# Altium PCB mcu core.PcbDoc
Units mil, origin at the board's own origin, x right, y up, seen from the top; angles counter-clockwise.
Board outline 3900 x 2955 mil, 2 copper layers (Top Layer, Bottom Layer); 26 components, 47 nets, 183 pads, 22 vias.
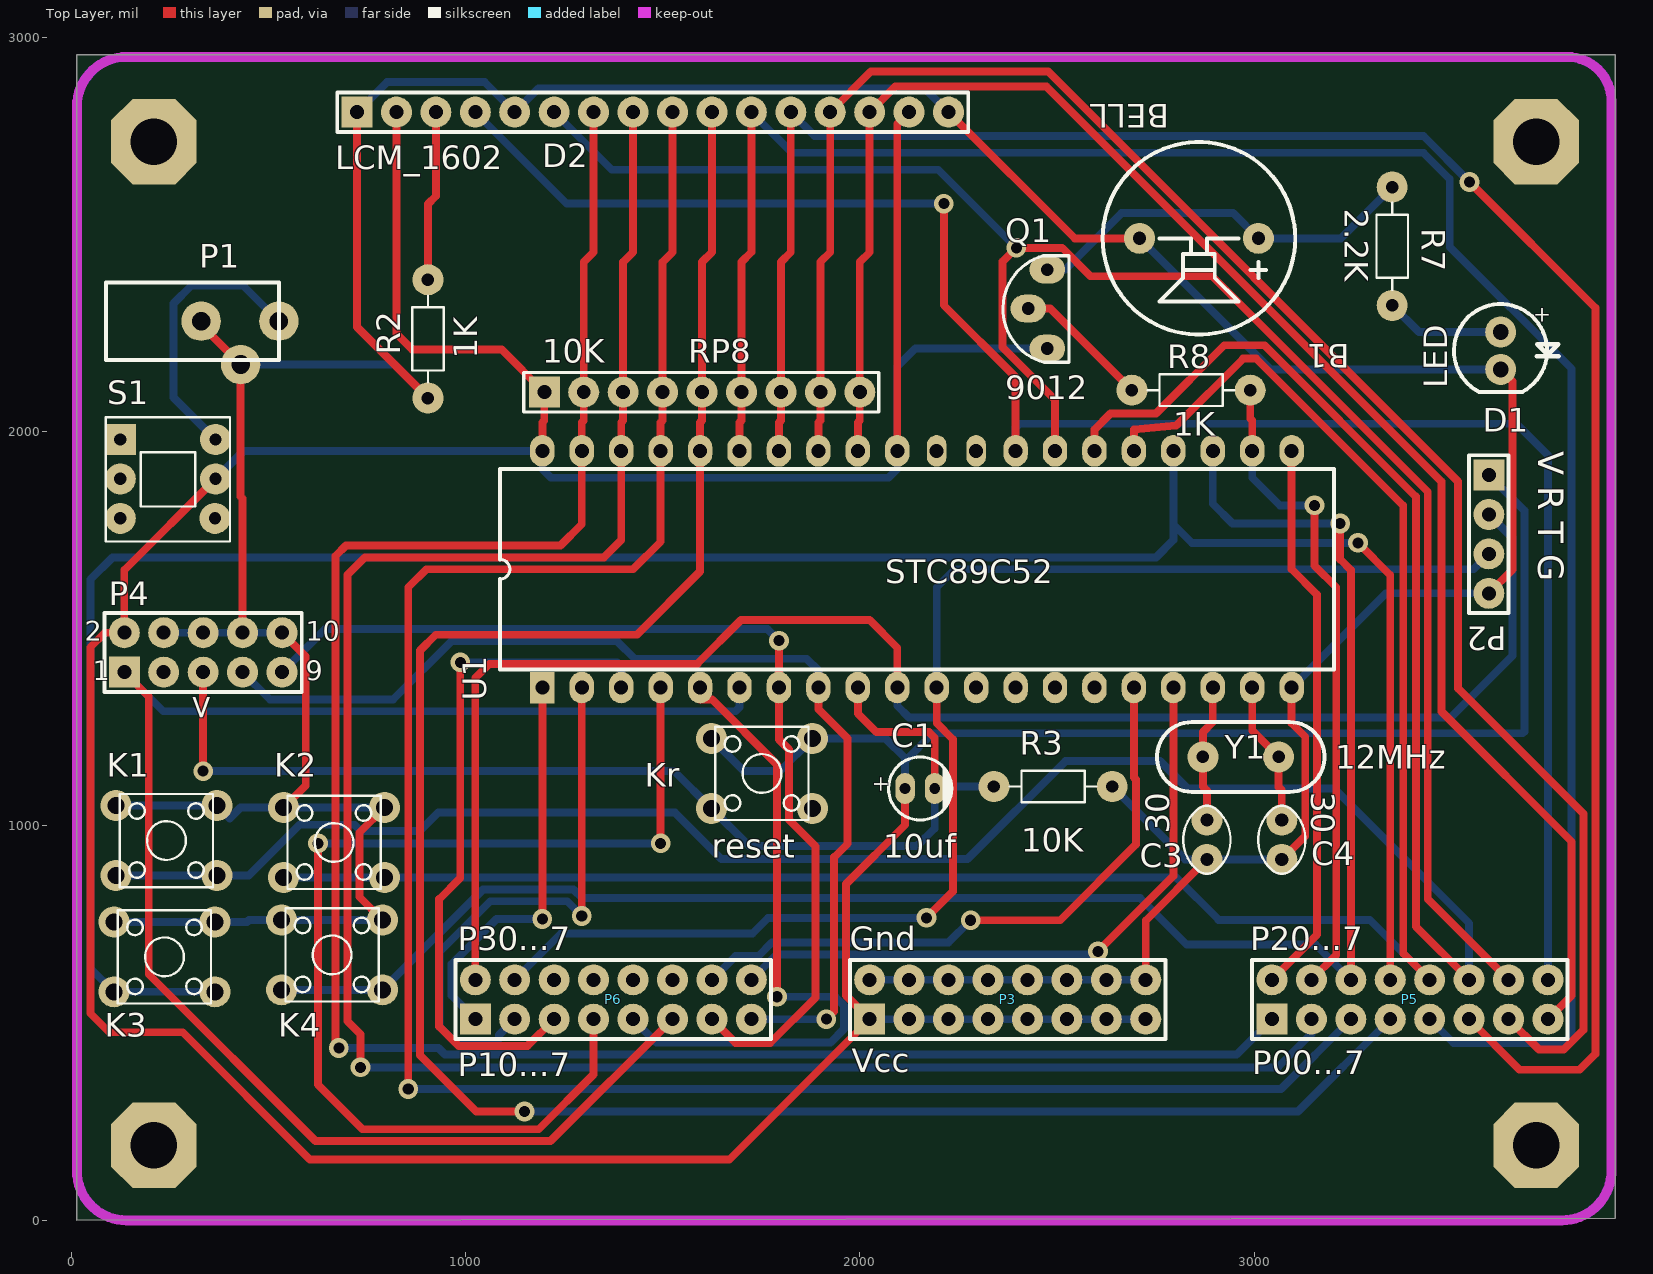
[diagram p0: Top Layer view]
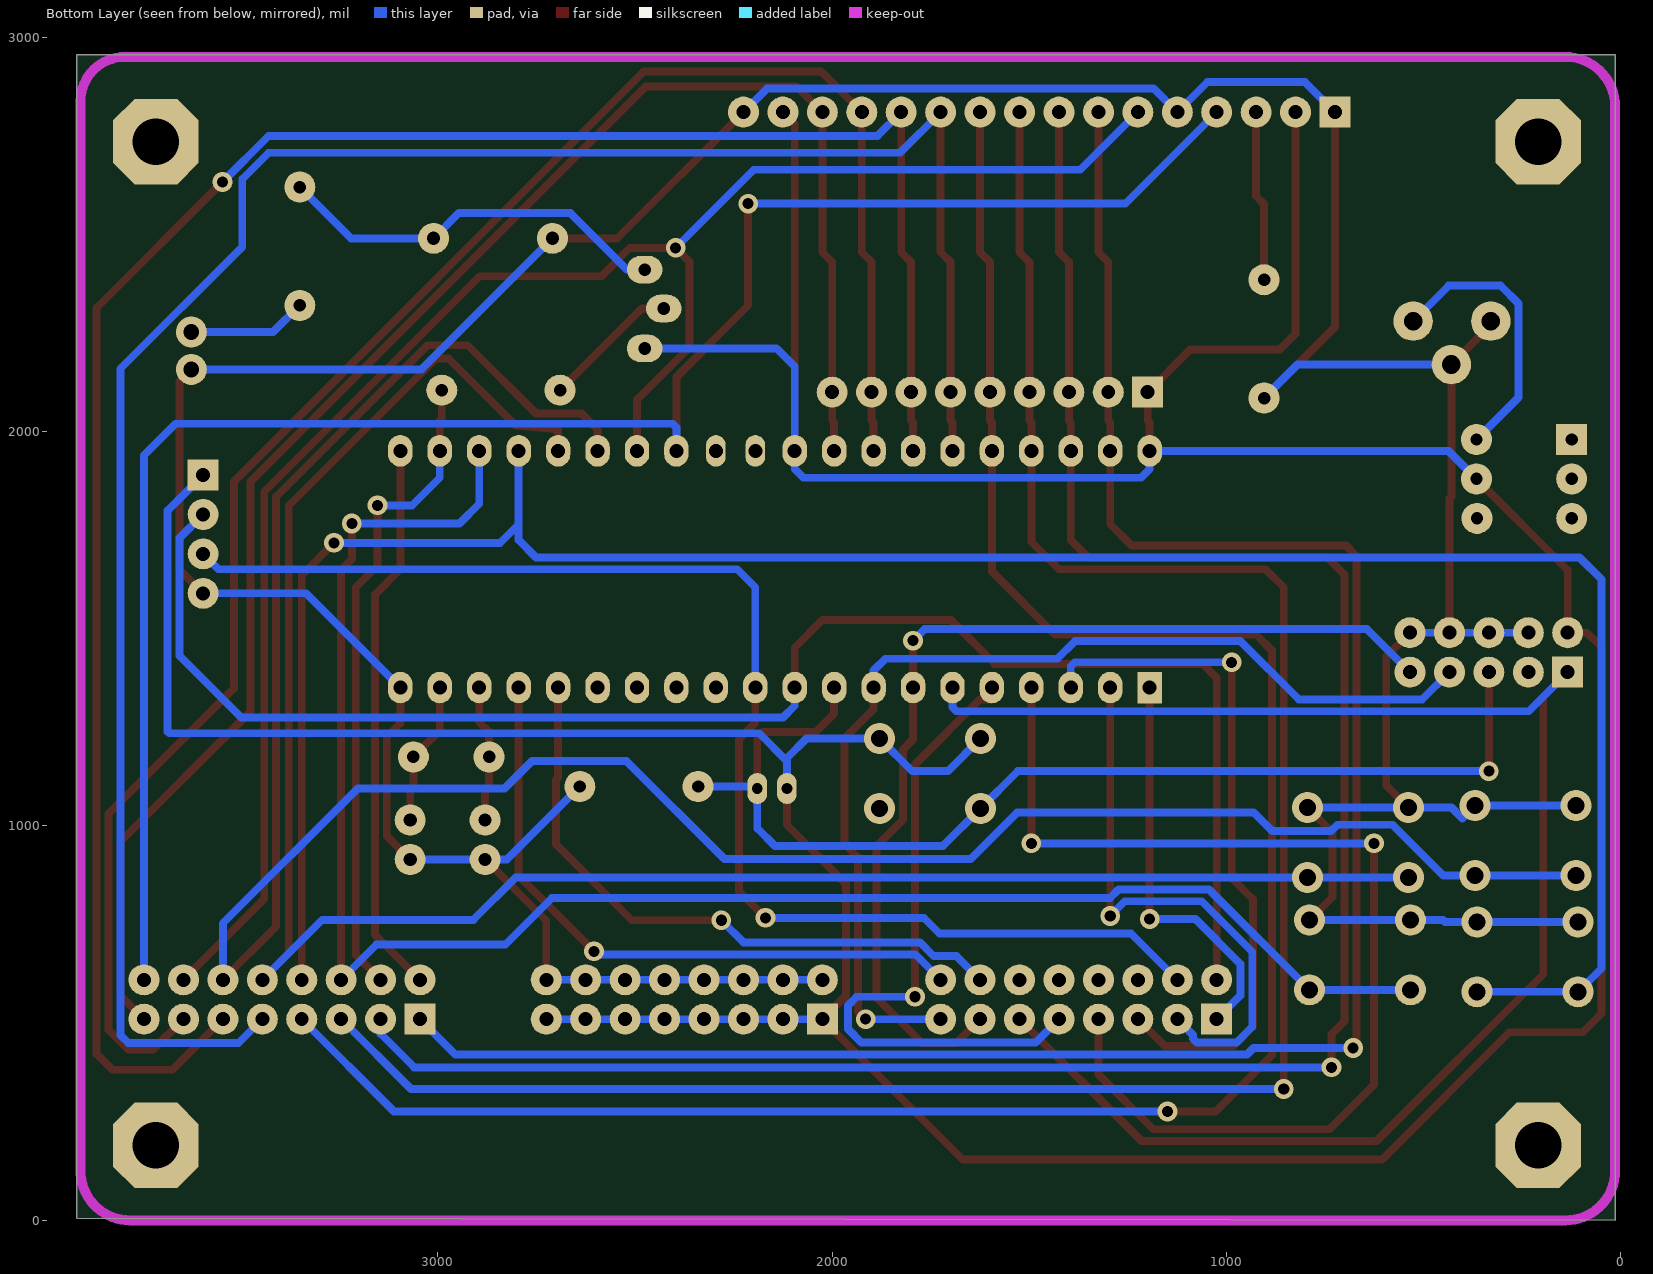
[diagram p1: Bottom Layer view, seen from below]
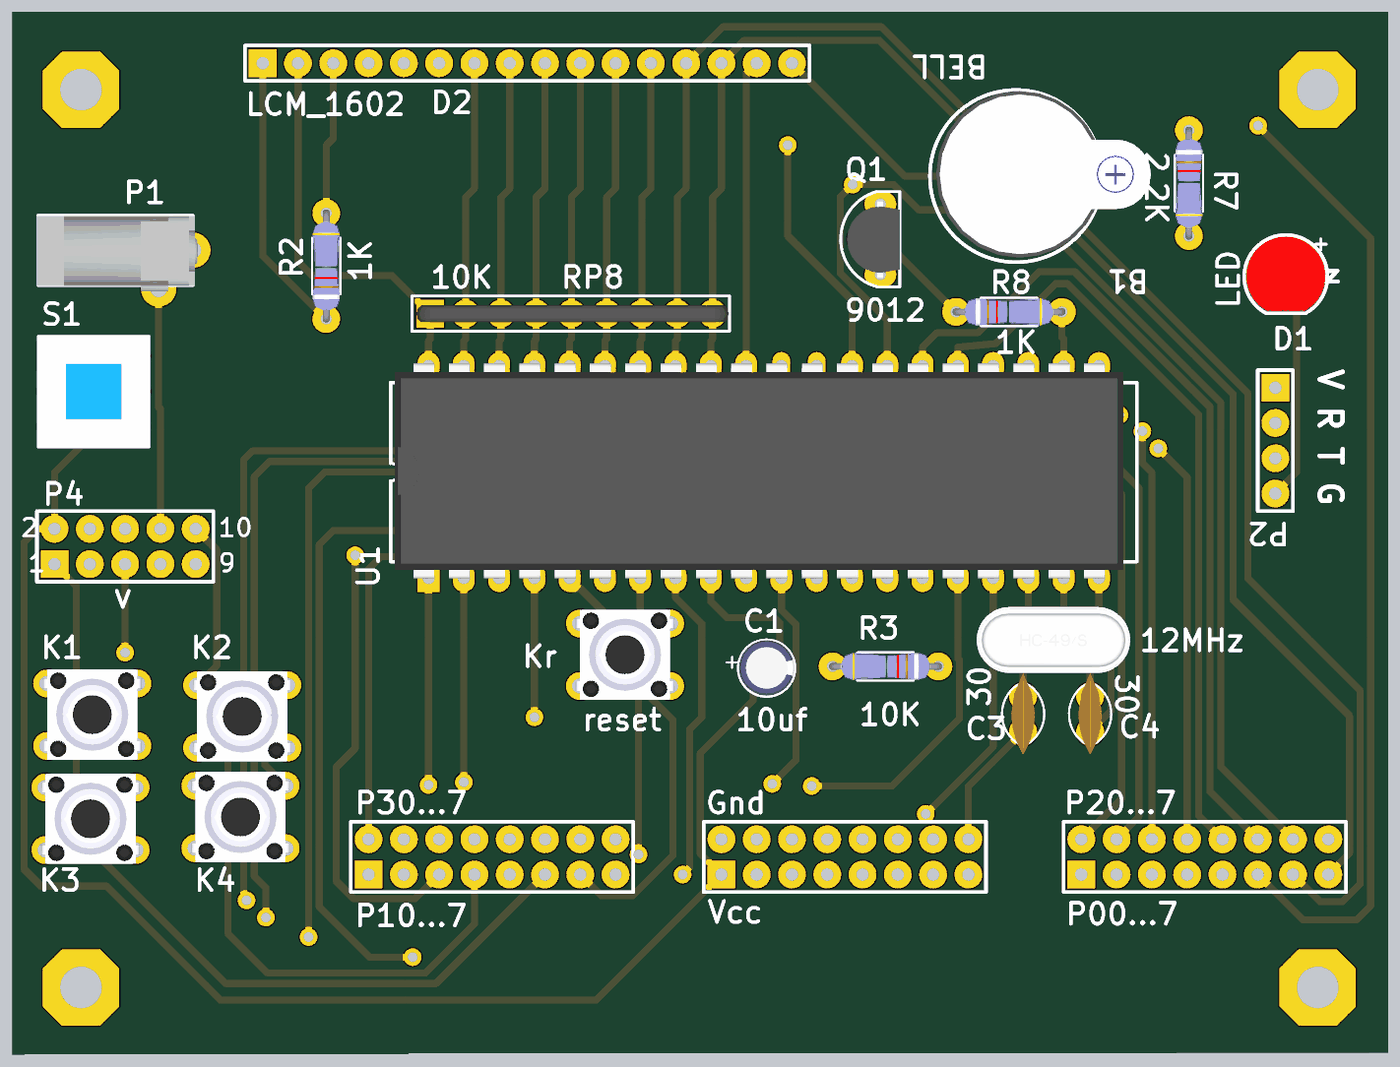
[diagram p2: 3D render of the assembled board from above, using the file's embedded part models]

## Layer stack, top to bottom
Top Layer: signal copper 1.4
Dielectric: dielectric 12.6, FR-4, Dk 4.8
Bottom Layer: signal copper 1.4

## Board outline
15,0 15,2955 3915,2955 3915,5

## Design rules (kind name [scope] priority, off if disabled: settings)
Clearance [All] p1: gap=10
PolygonConnect [All] p1: connectstyle=Relief reliefconductorwidth=10 reliefentries=4 polygonreliefangle="90 Angle"
RoutingVias [All] p1: holewidth=28 width=50 viastyle="Through Hole" minholewidth=28 minwidth=50 maxholewidth=28 maxwidth=50
SilkscreenOverComponentPads SilkToSolderMaskClearance [IsPad] p1: minsilkscreentomaskgap=10
SolderMaskExpansion [All] p1: expansion=4
Width [All] p1: maxlimit=30 minlimit=10 preferedwidth=20
27 further rules are at their usual default settings.

## Components (designator, comment, footprint, x,y, rotation, side; value= is the part's Value field where it differs from the comment)
B1 "BELL" BELL 2860,2490 r180 top
C1 "10uf" C4*7 2115,1095 r0 top
C3 "30" CAP-2.54 2880,965 r270 top
C4 "30" CAP-2.54 3070,965 r270 top
D1 "LED" LED5MM-RED 3625,2205 r180 top
D2 "LCM_1602" HDR1X16 725,2810 r0 top
K1 "KEY" SW-0606 360,845 r90 top
K2 "KEY" SW-0606 785,840 r90 top
K3 "KEY" SW-0606 355,550 r90 top
K4 "KEY" SW-0606 780,555 r90 top
Kr "reset" SW-0606 1870,1015 r90 top
P1 "POWER" DC002 330,2280 r0 top
P2 "下载口" HDR1X4 3595,1890 r270 top
P3 "Header 8X2" HDR2X8 2025,510 r0 top
P4 "Header 5X2" HDR2X5 135,1390 r0 top
P5 "Header 8X2A" HDR2X8_CEN 3045,510 r0 top
P6 "Header 8X2A" HDR2X8_CEN 1025,510 r0 top
Q1 "9012" TO-92A 2475,2210 r90 top
R2 "1K" 1/4W 905,2235 r90 top
R3 "10K" 1/4W 2490,1100 r180 top
R7 "2.2K" 1/4W 3350,2470 r270 top
R8 "1K" 1/4W 2840,2105 r0 top
RP8 "10K" R-9PIN 1200,2100 r0 top
S1 "SWITCH" SW-8X8X8 125,1980 r0 top
U1 "STC89C52" DIP40 2220,1655 r90 top
Y1 "12MHz" XTAL-49/S_N 2870,1175 r0 top

## Footprints (in the part's own frame and the unit in brackets; to place one, negate y for a bottom-side part, rotate by r counter-clockwise, add the part's x,y. Pads: shape width x height; smd on the part's side, far side on the other; paste and mask are expansions set on the pad)
1/4W [mm]
  round 2 hole 0.8: 1(-3.81,0) 2(3.81,0)
  silkscreen extent -2.79,-1.02 2.79,1.02, body extent -4.06,-0.97 4.06,0.97, height 2.51
BELL [mm]
  round 2 hole 0.85: 1(-3.825,0) 2(3.825,0)
  silkscreen extent -6.2,-6.2 6.2,6.2, body extent -9.71,-6.13 5.75,5.87, height 9.65
C4*7 [mm]
  oval 1.27x2 hole 0.7: 1(1.905,0) 2(0,0)
  silkscreen extent -1.07,-2.03 3,2.03, body extent -1.03,-1.98 2.97,2.02, height 7.01
CAP-2.54 [mm]
  round 2 hole 0.85: 1(-1.27,0) 2(1.27,0)
  silkscreen extent -2.18,-1.52 2.18,1.52, body extent -2.92,-0.85 2.92,0.85, height 5.92
DC002 [mm]
  round 2.54 hole 1.2: 1(5.004,0) 2(0,0) 3(2.54,-2.794)
  silkscreen extent -6.12,-2.51 5,2.49, body extent -6.26,-2.96 5.34,2.44, height 7.4
DIP40 [mil]
  rect 80x62 hole 35.43: 1(-304,1025)
  oval 80x62 hole 35.43: 2(-304,925) 3(-304,825) 4(-304,725) 5(-304,625) 6(-304,525) 7(-304,425) 8(-304,325) 9(-304,225) 10(-304,125) 11(-304,25) 12(-304,-75) 13(-304,-175) 14(-304,-275) 15(-304,-375) 16(-304,-475) 17(-304,-575) 18(-304,-675) 19(-304,-775) 20(-304,-875) 21(296,-875) 22(296,-775) 23(296,-675) 24(296,-575) 25(296,-475) 26(296,-375) 27(296,-275) 28(296,-175) 31(296,125) 32(296,225) 33(296,325) 34(296,425) 35(296,525) 36(296,625) 37(296,725) 38(296,825) 39(296,925) 40(296,1025)
  oval 80x50 hole 35.43: 29(296,-75) 30(296,25)
  silkscreen extent -258,-982 250,1132, body extent -306,-944 304,1120, height 224
HDR1X4 [mm] "Connector; Header; 4 Position"
  rect 2x2 hole 0.9: 1(0,0)
  round 2 hole 0.9: 2(2.54,0) 3(5.08,0) 4(7.62,0)
  silkscreen extent -1.27,-1.27 8.89,1.27
HDR1X16 [mm] "Connector; Header; 16 Position"
  rect 2x2 hole 0.9: 1(0,0)
  round 2 hole 0.9: 2(2.54,0) 3(5.08,0) 4(7.62,0) 5(10.16,0) 6(12.7,0) 7(15.24,0) 8(17.78,0) 9(20.32,0) 10(22.86,0) 11(25.4,0) 12(27.94,0) 13(30.48,0) 14(33.02,0) 15(35.56,0) 16(38.1,0)
  silkscreen extent -1.27,-1.27 39.37,1.27
HDR2X5 [mm] "Connector; Header; 5x2 Position"
  rect 2x2 hole 0.9: 1(0,0)
  round 2 hole 0.9: 2(0,2.54) 3(2.54,0) 4(2.54,2.54) 5(5.08,0) 6(5.08,2.54) 7(7.62,0) 8(7.62,2.54) 9(10.16,0) 10(10.16,2.54)
  silkscreen extent -1.27,-1.27 11.43,3.81
HDR2X8 [mm] "Connector; Header; 8x2 Position"
  rect 2x2 hole 0.9: 1(0,0)
  round 2 hole 0.9: 2(0,2.54) 3(2.54,0) 4(2.54,2.54) 5(5.08,0) 6(5.08,2.54) 7(7.62,0) 8(7.62,2.54) 9(10.16,0) 10(10.16,2.54) 11(12.7,0) 12(12.7,2.54) 13(15.24,0) 14(15.24,2.54) 15(17.78,0) 16(17.78,2.54)
  silkscreen extent -1.27,-1.27 19.05,3.81
HDR2X8_CEN [mm] "Connector; Header; 8x2 Position"
  rect 2x2 hole 0.9: 1(0,0)
  round 2 hole 0.9: 2(2.54,0) 3(5.08,0) 4(7.62,0) 5(10.16,0) 6(12.7,0) 7(15.24,0) 8(17.78,0) 9(0,2.54) 10(2.54,2.54) 11(5.08,2.54) 12(7.62,2.54) 13(10.16,2.54) 14(12.7,2.54) 15(15.24,2.54) 16(17.78,2.54)
  silkscreen extent -1.27,-1.27 19.05,3.81
LED5MM-RED [mm]
  round 2 hole 1.016 mask+0.03: 1(0,1.2) 2(0,-1.2)
  silkscreen extent -3.73,-3 3.01,2.65, body extent -2.85,-2.89 2.85,2.46, height 8.6
R-9PIN [mm]
  rect 2x2 hole 0.9: 1(0,0)
  round 2 hole 0.9: 2(2.54,0) 3(5.08,0) 4(7.62,0) 5(10.16,0) 6(12.7,0) 7(15.24,0) 8(17.78,0) 9(20.32,0)
  silkscreen extent -1.32,-1.27 21.54,1.27, body extent -1.01,-0.64 21.49,0.61, height 5.3
SW-8X8X8 [mm]
  rect 2x2 hole 0.8: 1(0,0)
  round 2 hole 0.8: 2(0,-2.54) 3(0,-5.08) 4(6.131,0) 5(6.131,-2.54) 6(6.096,-5.08)
  silkscreen extent -0.93,-6.57 7.07,1.43, body extent -0.93,-6.57 7.07,1.43, height 13.5
SW-0606 [mm]
  round 2 hole 1.1: 1(0.75,6.25) 1(0.75,-0.25) 2(5.25,6.25) 2(5.25,-0.25)
  silkscreen extent 0,0 6,6, body extent -0.25,-1.13 6.25,7.13, height 5
TO-92A [mil]
  oval 70x90 hole 32: 1(0.83,-0.5) 2(102,48) 3(200.83,-0.5)
  silkscreen extent -35,-56 236,112, body extent -12,-56 212,94, height 269
XTAL-49/S_N [mm] "短型晶振（未加焊）"
  round 2 hole 0.8: 1(0,0) 2(4.877,0)
  silkscreen extent -2.96,-2.25 7.83,2.25, body extent -2.95,-2.27 7.85,2.23, height 3.5

## Part data
C1: library part 电解电容, "Capacitor"
C3 C4: library part CAP, "Capacitor"
D1: library part LED5
D2: library part LCM1602
Kr: library part KEY
P2: library part "Header 4H", "Header, 4-Pin, Right Angle"
P3 P5 P6: "Header, 8-Pin, Dual row"
P4: "Header, 5-Pin, Dual row"
Q1: library part PNP
R2 R3 R7 R8: library part RES2
RP8: library part RP8
S1: library part "Header 3X2A", "Header, 3-Pin, Dual row"
U1: library part AT89C51
Y1: library part CRYSTAL, "Crystal"

## Free pads (board coordinates)
  oct 216.54x216.54 hole 118.11: 0(210,2735) 1(3715,2735) 2(3715,190) 3(210,190)

## Via types
v1: diameter 50, hole 28, Top Layer to Bottom Layer, 22 vias

## Nets (pads, with @x,y where several pads share a name; then routed paths per layer and width w, separated by ;. In a path a pad name is that pad's centre, name@x,y a point inside that pad or via, vN(x,y) a via of type N, cw(c..) or ccw(c..) an arc to the next point about the centre after c; other vN are vias at no path point)
GND: B1.2 C3.2 C4.2 D1.1 D2.1 D2.5 D2.16 K1.2 K2.2 K3.2 K4.2 P1.2 P1.3 P2.4 P3.2 P3.4 P3.6 P3.8 P3.10 P3.12 P3.14 P3.16 P4.4 P4.6 P4.8 P4.10 R2.1 R3.1 U1.20 | length 11196.7
  Top Layer w20: P1.2 330,2270 P1.3 430,1835 435,1830 P4.8 ; P4.10 595,1430 595,1102.75 K2.2@538.94,1046.69 ; D2.1 725,2265 R2.1 ; K4.2@789.84,761.69 731,820.53 731,982.85 K2.2@794.84,1046.69 ; D2.16 2545,2490 B1.2 ; P3.16 2725,760 C3.2 ; C4.2 3129.37,974.37 3129.37,1226 3095,1260.37 U1.20 ; P2.4 3655,1650 3655,2127.76 D1.1
  Bottom Layer w20: K3.2@108.94,756.69 364.84,756.69 446,756.69 451,761.69 533.94,761.69 K4.2@789.84,761.69 ; K1.2@113.94,1051.69 369.84,1051.69 402.34,1019.19 429.84,1046.69 538.94,1046.69 K2.2@794.84,1046.69 ; P4.4 P4.6 P4.8 P4.10 ; P1.3 820,2170 R2.1 ; D2.1 801,2886 1049,2886 D2.5 1185,2870 2165,2870 D2.16 ; P3.2 P3.4 P3.6 P3.8 P3.10 P3.12 P3.14 P3.16 ; R3.1 2825,915 C3.2 C4.2 ; B1.2 3041.65,2157.76 D1.1 ; U1.20 3334,1590 P2.4
MISO: P4.9 P6.7 U1.7 | length 2596.2
  Top Layer w20: P6.7 1685,450 1773,450 1888,565 1888,948.16 1820.47,1015.69 1820.47,1194 1795,1219.47 U1.7 v1(1795,1470)
  Bottom Layer w20: P4.9 644,1499 1766,1499 v1(1795,1470)
MOSI: P4.1 P6.6 U1.6 | length 4078
  Top Layer w20: P4.1 197,1328 197,624 620,201 1216,201 P6.6
  Bottom Layer w20: P4.1 234,1291 1685,1291 1695,1301 U1.6
NC: P4.3
NetB1_1: B1.1 Q1.3 R7.1 | length 1014.2
  Bottom Layer w20: Q1.3 2520.83,2410.83 2664,2554 2946.59,2554 B1.1 3220,2490 R7.1
NetC3_1: C3.1 U1.18 Y1.1 | length 350.5
  Top Layer w20: C3.1 2880,1090 2870,1100 Y1.1 2870,1238 2895,1263 U1.18
NetC4_1: C4.1 U1.19 Y1.2 | length 367.1
  Top Layer w20: U1.19 2995,1242 Y1.2 3062,1099 3070,1091 C4.1
NetD1_2: D1.2 R7.2 | length 303.1
  Bottom Layer w20: R7.2 3417.76,2252.24 D1.2
NetD2_3: D2.3 R2.2 | length 433.3
  Top Layer w20: R2.2 905,2577 925,2597 D2.3
NetP1_1: P1.1 S1.4 | length 712
  Bottom Layer w20: S1.4 260,2086.37 260,2325 305,2370 437,2370 P1.1
NetQ1_2: Q1.2 R8.1 | length 348.7
  Top Layer w20: Q1.2 2483,2312 R8.1
P00: D2.7 P5.1 RP8.2 U1.39 | length 5375.7
  Top Layer w20: v1(679,437) 671,445 671,1685 697,1711 1241,1711 1295,1765 U1.39 1295,2023 1300,2028 RP8.2 1300,2430 1325,2455 D2.7
  Bottom Layer w20: v1(679,437) 931.84,437 948.21,420.63 2955.63,420.63 P5.1
P01: D2.8 P5.2 RP8.3 U1.38 | length 5573.8
  Top Layer w20: v1(734,388) 734,472 701,505 701,1637 745,1681 1351,1681 1395,1725 U1.38 1395,2023 1400,2028 RP8.3 1400,2430 1425,2455 D2.8
  Bottom Layer w20: v1(734,388) 3060,388 3145,473 P5.2
P02: D2.9 P5.3 RP8.4 U1.37 | length 5524.7
  Top Layer w20: v1(855.06,333) 855.06,1605 901.06,1651 1425,1651 1495,1721 U1.37 1495,2023 1500,2028 RP8.4 1500,2430 1525,2455 D2.9
  Bottom Layer w20: v1(855.06,333) 3068,333 P5.3
P03: D2.10 P5.4 RP8.5 U1.36 | length 5612.6
  Top Layer w20: v1(1150,276) 1027.57,276 885.06,418.51 885.06,1445 925.06,1485 1435,1485 1595,1645 U1.36 1595,2023 1600,2028 RP8.5 1600,2430 1625,2455 D2.10
  Bottom Layer w20: v1(1150,276) 3111,276 P5.4
P04: D2.11 P5.5 RP8.6 U1.35 | length 5404
  Top Layer w20: U1.35 1695,2023 1700,2028 RP8.6 1700,2430 1725,2455 D2.11
  Bottom Layer w20: D2.11 1828,2707 3429,2707 3496,2640 3496,2468 3805,2159 3805,470 3785,450 3505,450 P5.5
P05: D2.12 P5.6 RP8.7 U1.34 | length 5398.5
  Top Layer w20: U1.34 1795,2023 1800,2028 RP8.7 1800,2430 1825,2455 D2.12 ; P5.6 3673,382 3825,382 3865,422 3865,2314 v1(3546,2633)
  Bottom Layer w20: D2.12 1885,2750 3429,2750 v1(3546,2633)
P06: D2.13 P5.7 RP8.8 U1.33 | length 4701.6
  Top Layer w20: U1.33 1895,2023 1900,2028 RP8.8 1900,2430 1925,2455 D2.13 2028,2913 2477.72,2913 3517,1873.72 3517,1349 3835,1031 3835,483 3785,433 3722,433 P5.7
P07: D2.14 P5.8 RP8.9 U1.32 | length 4287.9
  Top Layer w20: U1.32 1995,2023 2000,2028 RP8.9 2000,2430 2025,2455 D2.14 2090,2875 2473,2875 3474.97,1873.03 3474.97,1290.03 3805,960 3805,570 P5.8
P10: P6.1 U1.1 | length 1029.1
  Top Layer w20: v1(1195,764) U1.1
  Bottom Layer w20: P6.1 965,570 965,650 1079,764 v1(1195,764)
P11: P6.2 U1.2 | length 1434.4
  Top Layer w20: v1(1295,772) U1.2
  Bottom Layer w20: P6.2 1085,470 1085,460.63 1075,450.63 975,450.63 935,490.63 935,681 1063,809 1258,809 v1(1295,772)
P12: P6.3 U1.3 | length 1752
  Top Layer w20: v1(987,1415) 987,867.88 933.47,814.35 933.47,491.53 983,442 1157,442 P6.3
  Bottom Layer w20: v1(987,1415) 1385,1415 1395,1405 U1.3
P13: P6.4 U1.4 | length 2819.4
  Top Layer w20: v1(626,956) 626,344 739,231 1186,231 1325,370 P6.4 ; v1(1495,956) U1.4
  Bottom Layer w20: v1(626,956) v1(1495,956)
P14: P6.5 U1.5 | length 1695.3
  Top Layer w20: U1.5 1595,1321 1625,1321 1790,1156 v1(1790,567)
  Bottom Layer w20: P6.5 1484.37,450.63 1925.63,450.63 1960,485 1960,545 1938,567 v1(1790,567)
P17: P4.7 P6.8 U1.8 | length 2708.1
  Top Layer w20: U1.8 1895,1296 1969.21,1221.79 1969.21,955.16 1935,920.94 1935,530 v1(1915,510)
  Bottom Layer w20: P4.7 504,1321 817,1321 965,1469 1384,1469 1429,1424 1865,1424 1895,1394 U1.8 ; P6.8 v1(1915,510)
P20: P5.9 U1.21 | length 1415
  Top Layer w20: P5.9 3159.37,724.37 3159.37,1586.63 3095,1651 U1.21
P21: P5.10 R8.2 U1.22 | length 1662.9
  Top Layer w20: R8.2 2990,2033 2995,2028 U1.22 ; P5.10 3208,673 3208,1605 3153,1660 v1(3153,1813)
  Bottom Layer w20: U1.22 2995,1883 3065,1813 v1(3153,1813)
P22: K4.1 P5.11 U1.23 | length 4557.2
  Top Layer w20: v1(3218,1767) 3218,1676 3245,1649 P5.11
  Bottom Layer w20: K4.1@533.94,584.53 789.84,584.53 1044.31,839 1273.99,839 1295.99,817 2711,817 2829,699 3156,699 P5.11 ; U1.23 2895,1817 2945,1767 v1(3218,1767)
P23: K3.1 P5.12 U1.24 | length 6155.1
  Top Layer w20: v1(3263,1718) 3345,1636 P5.12
  Bottom Layer w20: K3.1@364.84,579.53 108.94,579.53 49,639.47 49,1625 105,1681 2751,1681 2795,1725 2795,1765 ; v1(3263,1718) 2842,1718 2795,1765 ; 2795,1765 U1.24 2795,1765
P24: K2.1 P5.13 U1.25 | length 5205.9
  Top Layer w20: U1.25 2695,2005 2802,2015 2972,2185 3005.28,2185 3378,1812.28 3378,677 P5.13
  Bottom Layer w20: K2.1@538.94,869.53 794.84,869.53 2802.47,869.53 2910,762 3293,762 P5.13
P25: K1.1 P5.14 U1.26 | length 6373.7
  Top Layer w20: U1.26 2595,2005 2635.63,2045.63 2751,2045.63 2924.37,2219 3026,2219 3410,1835 3410,745 P5.14
  Bottom Layer w20: K1.1@113.94,874.53 369.84,874.53 450.74,874.53 579.21,1003 719,1003 735,987 884,987 931,1034 1531,1034 1649,916 2273,916 2522,1165 2761,1165 2831,1095 3203,1095 3545,753 P5.14
P26: D2.6 P5.15 U1.27 | length 4520.6
  Top Layer w20: U1.27 2495,2081 2362,2214 2362,2431 v1(2397,2466) 2513,2466 2585,2394 2893.43,2394 3440,1847.43 3440,815 P5.15
  Bottom Layer w20: D2.6 1371,2664 2199,2664 v1(2397,2466)
P27: D2.4 P5.16 U1.28 | length 4762.8
  Top Layer w20: v1(2213,2578) 2213,2320.57 2395,2138.57 U1.28
  Bottom Layer w20: D2.4 1257,2578 v1(2213,2578) ; U1.28 2395,2010 2405,2020 3665,2020 3745,1940 P5.16
P30: P2.2 P6.9 U1.10 | length 4092.5
  Top Layer w20: P6.9 1025,1375 1061,1411 1588,1411 1699,1522 2025,1522 2095,1452 U1.10
  Bottom Layer w20: U1.10 2095,1305 2125,1275 3498.5,1275 3655,1431.5 3655,1730 P2.2
P31: P2.3 P6.10 U1.11 | length 3427
  Top Layer w20: v1(2169,767) 2236,834 2236,1220 2195,1261 U1.11
  Bottom Layer w20: P6.10 1242,727 1727.59,727 1767.59,767 v1(2169,767) ; U1.11 2195,1605 2241,1651 3556,1651 P2.3
P32: P6.11
P32/IT0: U1.12
P33: P6.12
P33/IT1: U1.13
P34: P6.13
P34/T0: U1.14
P35: P6.14
P35/T1: U1.15
P36: P6.15 U1.16 | length 1617.1
  Top Layer w20: v1(2281,761) 2508,761 2700,953 2700,1118 2695,1123 U1.16
  Bottom Layer w20: P6.15 1685,670 1742.38,670 1776.88,704.5 2224.5,704.5 v1(2281,761)
P37: P6.16 U1.17 | length 1656.9
  Top Layer w20: v1(2604,682) 2795,873 U1.17
  Bottom Layer w20: P6.16 1789.5,674.5 2596.5,674.5 v1(2604,682)
RST: C1.1 Kr.1@1623.94,1044.53 P4.5 R3.2 U1.9 | length 2874
  Top Layer w20: v1(335,1139) P4.5 ; U1.9 1995,1285 2042,1238 2175,1238 2190,1223 C1.1
  Bottom Layer w20: v1(335,1139) 1529.47,1139 1623.94,1044.53 1719.47,949 2145,949 2190,994 C1.1 2190,1100 R3.2
VCC: C1.2 D2.2 D2.15 Kr.2 P2.1 P3.1 P3.3 P3.5 P3.7 P3.9 P3.11 P3.13 P3.15 P4.2 Q1.1 RP8.1 S1.5 U1.31 U1.40 | length 12682.7
  Top Layer w20: S1.5 135,1648.63 P4.2 86,1490 49,1453 49,525 97,477 283,477 606,154 1669,154 P3.1 1965,570 1965,853 2115,1003 C1.2 ; D2.2 825,2248 865,2208 1092,2208 RP8.1 1200,2028 1195,2023 U1.40 ; U1.31 2095,2780 D2.15
  Bottom Layer w20: S1.5 437.37,1951 U1.40 1195,1905 1217,1883 2073,1883 2095,1905 U1.31 2095,2165 2140.83,2210.83 Q1.1 ; Kr.2@1623.94,1221.69 1706.63,1139 1797.15,1139 1879.84,1221.69 2065,1221.69 2115,1171.69 2115,1165 ; P3.1 P3.3 P3.5 P3.7 P3.9 P3.11 P3.13 P3.15 ; P2.1 3685,1800 3685,1239 3681,1235 2185,1235 2115,1165 ; 2115,1165 C1.2 2115,1165
pads on no net: Kr.1@1879.84,1044.53 S1.1 S1.2 S1.3 S1.6 U1.29 U1.30

## Keep-outs
Keep-Out Layer:
  lines w25: 3905.78,115.78 3905.78,2838.44 ccw(c3794.21,2838.44) 3794.21,2950 140,2950 ccw(c140,2825) 15,2825 15,125 ccw(c140,125) 140,0 3780.78,0 ccw(c3780.78,125) 3905.78,125

## Silkscreen, mask and mechanical layers (free items; w line width, h text height)
Top Overlay:
  text "V R T G" at 3720,1950 h65 r270
  text ">" at 305,1335 h60 r270
  text "P30...7" at 980,685 h60
  text "Gnd" at 1975,685 h60
  text "P20...7" at 2990,685 h60
  text "Vcc" at 1980,375 h60
  text "P00...7" at 2995,370 h60
  text "P10...7" at 980,365 h60

## Text inside footprints (layer, text, board x,y; h text height)
C1: Top Overlay "+" at 2071,1083 h40 r90
D1: Top Overlay "+" at 3753.66,2312.19 h39.37 r180
P4: Top Overlay "2" at 35,1470 h50; Top Overlay "1" at 55,1370 h50; Top Overlay "9" at 595,1370 h50; Top Overlay "10" at 595,1470 h50